# Altium PCB project1.PcbDoc
Units mil, origin at the board's own origin, x right, y up, seen from the top; angles counter-clockwise.
Board outline 2860 x 960 mil, 2 copper layers (Top Layer, Bottom Layer); 35 components, 44 nets, 113 pads, 10 vias.
Unrouted connection lines stored in the file: 1.
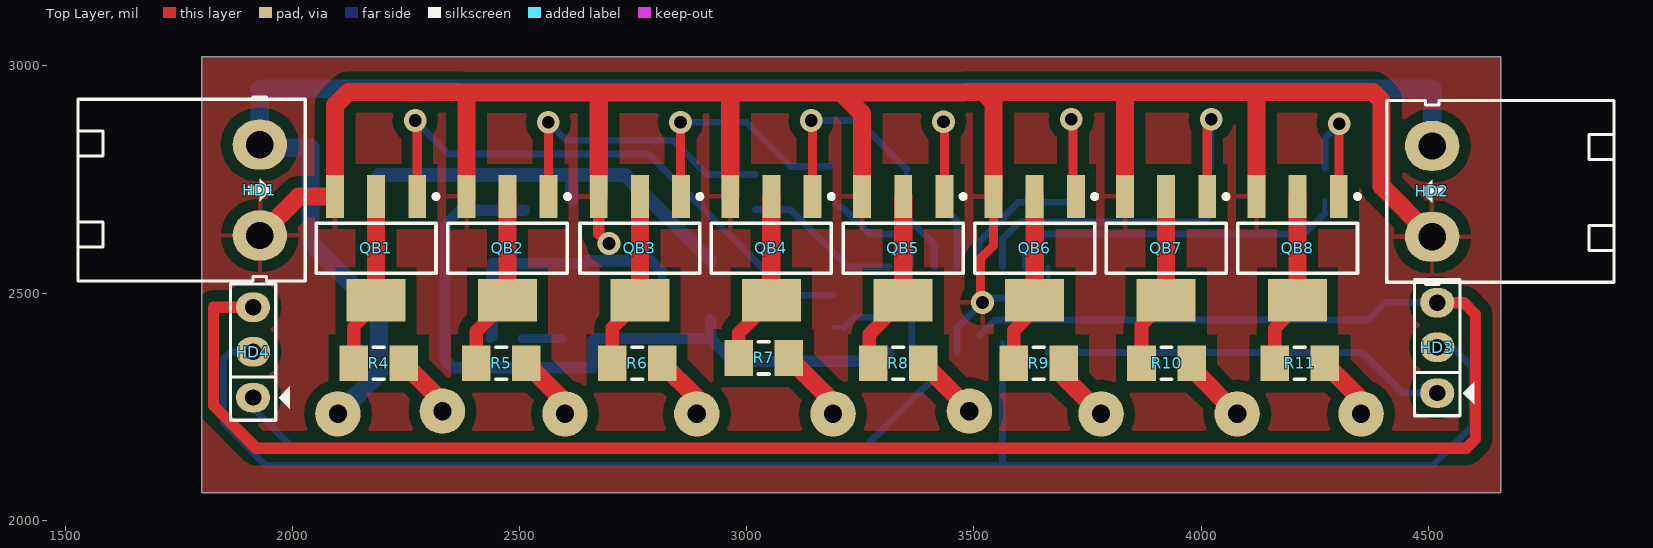
[diagram p0: Top Layer view]
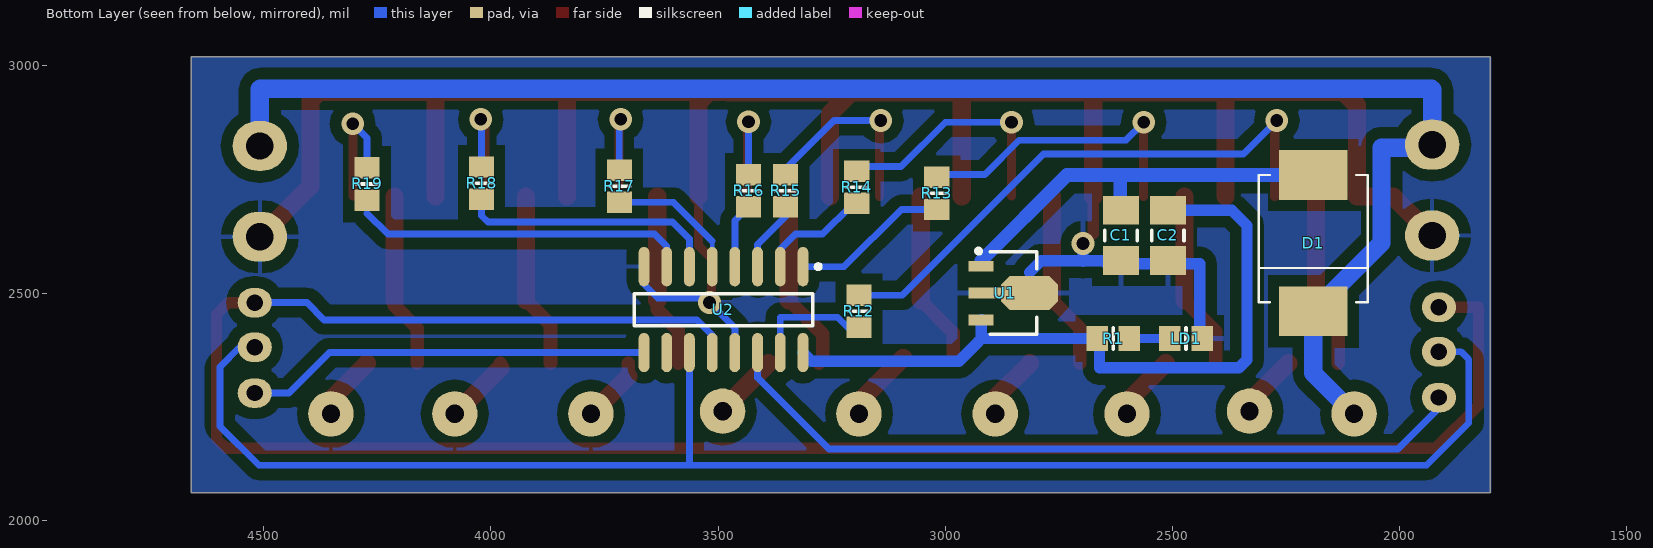
[diagram p1: Bottom Layer view, seen from below]
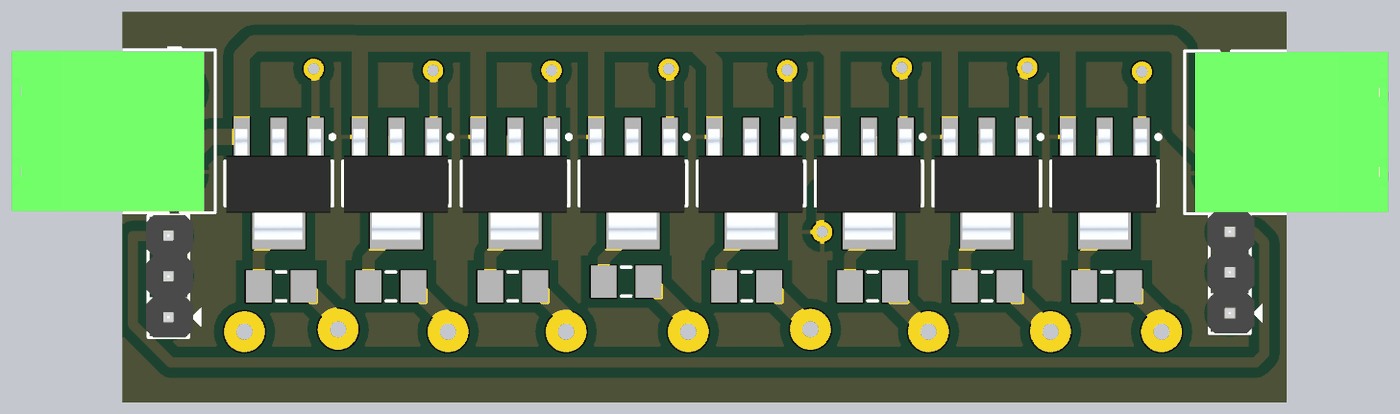
[diagram p2: 3D render of the assembled board from above, using the file's embedded part models]

## Layer stack, top to bottom
Top Layer: signal copper 1.4
Dielectric: dielectric 12.6, FR-4, Dk 4.8
Bottom Layer: signal copper 1.4

## Board outline
1800,3020 1800,2060 4660,2060 4660,3020

## Design rules (kind name [scope] priority, off if disabled: settings)
Clearance Polygon [All vs InPolygon] p1: gap=25
Clearance [All] p2: gap=10
PolygonConnect [All] p1: connectstyle=Relief reliefconductorwidth=10 reliefentries=4 polygonreliefangle="90 Angle"
RoutingVias [All] p1: holewidth=28 width=50 viastyle="Through Hole" minholewidth=28 minwidth=50 maxholewidth=28 maxwidth=50
SilkscreenOverComponentPads SilkToSolderMaskClearance [IsPad] p1: minsilkscreentomaskgap=10
SolderMaskExpansion [All] p1: expansion=4
Width [All] p1: maxlimit=1000 minlimit=5 preferedwidth=15
27 further rules are at their usual default settings.

## Classes and differential pairs
component class project1: C1 C2 D1 HD1 HD2 HD3 HD4 LD1 QB1 QB2 QB3 QB5 QB6 QB7 QB8 R1 R4 R5 R6 R7 R8 R9 R10 R11 R12 R14 R15 R16 R17 R18 R19 U1 U2

## Components (designator, comment, footprint, x,y, rotation, side; value= is the part's Value field where it differs from the comment)
C1 "100uF/35V" MELF-R3216-1206 2613.19,2626.97 r270 bottom
C2 "1000uF/16V" MELF-R3216-1206 2509.84,2626.97 r270 bottom
D1 "1N4007" DIODE_SMC 2190,2610 r90 bottom
HD1 "Header 2" HED2T 1928.15,2826.77 r270 top
HD2 "Header 2" HED2T 4508.86,2624.02 r90 top
HD3 "Header 3" JP3 4520,2380 r90 top
HD4 "Header 3" JP3 1913.39,2370.08 r90 top
LD1 "LED" 6-0805_N 2470,2400 r180 bottom
QB1 "D718" SOT223-4N 2184.06,2598.43 r270 top
QB2 "D718" SOT223-4N 2473.43,2598.43 r270 top
QB3 "D718" SOT223-4N 2764.76,2598.43 r270 top
QB4 "D718" SOT223-4N 3054.13,2598.43 r270 top
QB5 "D718" SOT223-4N 3344.49,2598.43 r270 top
QB6 "D718" SOT223-4N 3633.86,2598.43 r270 top
QB7 "D718" SOT223-4N 3923.23,2598.43 r270 top
QB8 "D718" SOT223-4N 4212.6,2598.43 r270 top
R1 "1K" 6-0805_N 2630,2400 r0 bottom
R4 "1K" MELF-R3216-1206 2189.96,2345.47 r0 top
R5 "1K" MELF-R3216-1206 2459.65,2345.47 r0 top
R6 "1K" MELF-R3216-1206 2758.86,2345.47 r0 top
R7 "1K" MELF-R3216-1206 3037.4,2357.28 r0 top
R8 "1K" MELF-R3216-1206 3333.66,2345.47 r0 top
R9 "1K" MELF-R3216-1206 3642.72,2345.47 r0 top
R10 "1K" MELF-R3216-1206 3924.21,2345.47 r0 top
R11 "1K" MELF-R3216-1206 4217.52,2345.47 r0 top
R12 "1K" 6-0805_N 3190,2460 r90 bottom
R13 "1K" 6-0805_N 3018.7,2719.49 r90 bottom
R14 "1K" 6-0805_N 3194.88,2733.27 r90 bottom
R15 "1K" 6-0805_N 3351.38,2725.39 r90 bottom
R16 "1K" 6-0805_N 3433.07,2725.39 r90 bottom
R17 "1K" 6-0805_N 3717.52,2735.24 r90 bottom
R18 "1K" 6-0805_N 4020.67,2742.13 r90 bottom
R19 "1K" 6-0805_N 4272.64,2740.16 r90 bottom
U1 "L78M05ABV" SOT89N 2850,2500 r180 bottom
U2 "74HC595" so16 3488.19,2463.58 r270 bottom

## Footprints (in the part's own frame and the unit in brackets; to place one, negate y for a bottom-side part, rotate by r counter-clockwise, add the part's x,y. Pads: shape width x height; smd on the part's side, far side on the other; paste and mask are expansions set on the pad)
6-0805_N [mm] "Chip Resistor, Body 2.0x1.2mm, IPC Medium Density"
  rect 1.2x1.4 smd: 1(-0.9,0) 2(0.9,0)
  silkscreen extent 0,-0.6 0,0.6, body extent -1.07,-0.7 1.07,0.7, height 0.7
DIODE_SMC [mil] "Diode; 2 Leads"
  rect 110x150 smd: 1(-150,0) 2(150,0)
  silkscreen extent -130,-120 150,120
HED2T [mil] "Header 2, 2 pin, hight 300mil, Pin to Pin 200, Colour Green"
  oval 110x120 hole 60: 1(0,0) 2(200,0)
  silkscreen extent -105,-400 300,100, body extent -97,-399 297,73, height 334
JP3 [mil] "Jumper 3"
  oval 65x75 hole 36: 1(-100,0) 2(1,0) 3(99,0)
  silkscreen extent -150,-81 150,50, body extent -150,-60 150,55, height 355
MELF-R3216-1206 [mm] "Metal Electrode Face (MELF) Resistor; Body 3.2 x 1.8 mm (LxDia)"
  rect 1.6x2 smd: 1(-1.4,0) 2(1.4,0)
  silkscreen extent -0.3,-0.9 0.3,0.9
so16 [mm] "SOIC, 16-Leads, Body 9.9x3.9mm, Pitch 1.27mm, IPC Medium Density"
  oval 2.2x0.6 smd: 1(-2.4,4.445) 2(-2.4,3.175) 3(-2.4,1.905) 4(-2.4,0.635) 5(-2.4,-0.635) 6(-2.4,-1.905) 7(-2.4,-3.175) 8(-2.4,-4.445) 9(2.4,-4.445) 10(2.4,-3.175) 11(2.4,-1.905) 12(2.4,-0.635) 13(2.4,0.635) 14(2.4,1.905) 15(2.4,3.175) 16(2.4,4.445)
  silkscreen extent -2.52,-5 0.9,5.42, body extent -1.95,-4.95 1.95,4.95, height 1.75
SOT89N [mm] "SOT89, 3-Leads, Body 4.5x2.4 mm, Pitch 1.5mm, Lead Span 4.1mm, IPC Medium Density"
  rect 1.4x0.6 smd: 1(-1.8,1.5) 3(-1.8,-1.5)
  rect 1.8x0.6 smd: 2(-1.6,0)
  oct 3.2x1.9 smd: 2(0.9,0)
  silkscreen extent -2.07,-2.3 1.3,2.47, body extent -1.3,-2.3 1.3,2.3, height 1.6
SOT223-4N [mm] "SOT223, 4-Leads, Body 6.5x3.5mm, Pitch 2.3mm, Lead Span 7mm, IPC Medium Density"
  rect 2.4x1 smd: 1(-2.9,2.3) 2(-2.9,0) 3(-2.9,-2.3)
  rect 2.4x3.3 smd: 4(2.9,0)
  silkscreen extent -3.02,-3.35 1.4,3.48, body extent -3.39,-3.27 3.5,3.23, height 1.72

## Part data
C1: library part CP3, "Cap 100uF/35V - 470uF/16V"
C2: library part CP4, "Cap 1000uF/16V - 220uF/50V"
D1: library part D1A, "Diode 1A"
HD1 HD2: library part "Hed 2", "Header 2 (Green)"
HD3 HD4: library part "Hed 3", "Header 3 (Green)"
LD1: "LED Single colour Green and Red"
QB1 QB2 QB3 QB4 QB5 QB6 QB7 QB8: "Transistor Power Supply"
R1 R4 R5 R6 R7 R8 R9 R10 R11 R12 R13 R14 R15 R16 R17 R18 R19: library part R1/4W, "Resistor 1/4W"
U1: "Precision 500mA Regulator"

## Free pads (board coordinates)
  round 100 hole 40: 5(3490,2240) 6(3780,2234.25) 7(4079.72,2234.25) 8(4352.36,2234.25) 9(3190,2234.25) 10(2890,2234.25) 11(2600,2234.25) 12(2330,2240) 13(2100,2234.25)

## Via types
v1: diameter 50, hole 28, Top Layer to Bottom Layer, 10 vias

## Nets (pads, with @x,y where several pads share a name; then routed paths per layer and width w, separated by ;. In a path a pad name is that pad's centre, name@x,y a point inside that pad or via, vN(x,y) a via of type N, cw(c..) or ccw(c..) an arc to the next point about the centre after c; other vN are vias at no path point)
5VDC: U2.10
12VDC: D1.1 HD1.1 HD2.2 pad.13 | length 3638.5
  Top Layer w30: pad.13@2100,2220 pad.13
  Bottom Layer w30: HD1.1 HD1.1@1934.92,2820
  Bottom Layer w40: HD1.1 1928.15,2948.15 ; 1930,2950 4507.95,2950 ; HD1.1@1934.92,2820 2040,2820 2040,2610 D1.1 2190,2324.25 pad.13 ; HD2.2 4508.86,2949.09
CLOCK: HD3.2 HD4.2 U2.11 | length 3531.5
  Bottom Layer w10: U2.11 U2.11@3563.19,2391.93
  Bottom Layer w15: HD4.2 1865.17,2371.08 1847.44,2353.35 1847.44,2214.57 1940.94,2121.06 4510.83,2121.06 4596.46,2206.69 4596.46,2337.6 4553.06,2381 HD3.2 ; 3563.19,2121.06 U2.11
"DATA IN": HD4.1 U2.14 | length 1681.1
  Bottom Layer w10: HD4.1@1913.39,2246.61 HD4.1
  Bottom Layer w15: HD4.1@1913.39,2246.61 2003.5,2156.5 3255.91,2156.5 3413.19,2313.78 U2.14
"DATA OUT": HD3.1 U2.9 | length 893.7
  Bottom Layer w15: U2.9 4355.31,2369.09 4444.41,2280 HD3.1
GND: C1.2 C2.2 HD1.2 HD2.1 LD1.2 QB1.3 QB2.3 QB3.3 QB4.3 QB5.3 QB6.3 QB7.3 QB8.3 U1.2 U2.8 U2.13 | length 6358.6
  Top Layer w10: v1@3514.76,2481.3 3517.03,2481.3 v1(3518.87,2479.45)
  Top Layer w20: 2674.21,2630.91 2687.01,2618.11 2705.71,2618.11 v1(2696.85,2609.25) ; v1@3514.76,2481.3 3514.76,2576.77 3543.31,2605.32 QB6.3
  Top Layer w25: 2674.21,2630.91 QB3.3
  Top Layer w30: 2369.09,2942.91 2375,2937.01 ; 2379.72,2941.73 2375,2937.01 ; 2674.21,2938.58 2382.87,2938.58 2382.87,2929.13 2375,2937.01 ; 3478.35,2941.73 3479.53,2942.91 ; 4116.14,2942.91 4122.05,2937.01
  Top Layer w40: HD1.2 2013.98,2712.6 QB1.3 2093.5,2913.39 2123.03,2942.91 2369.09,2942.91 ; 2379.72,2941.73 3207.87,2941.73 ; QB2.3 2382.87,2929.13 ; QB3.3 2674.21,2938.58 ; QB4.3 2963.58,2932.09 ; QB5.3 3253.94,2895.67 3207.87,2941.73 ; 3478.35,2941.73 3207.87,2941.73 ; 3479.53,2942.91 3832.68,2942.91 ; 3520.87,2941.73 3543.31,2919.29 QB6.3 ; QB7.3 3832.68,2942.91 ; QB8.3 4122.05,2937.01 ; HD2.1 4397.64,2735.24 4397.64,2924.21 4378.94,2942.91 4116.14,2942.91 3832.68,2942.91
  Bottom Layer w10: v1(3518.87,2479.45) v1@3528.59,2489.17 ; U2.8@3663.19,2519.49 U2.8
  Bottom Layer w15: U2.13 3463.19,2423.19 v1@3519.16,2479.16 ; v1@3528.59,2489.17 3632.87,2489.17 U2.8@3663.19,2519.49
  Bottom Layer w20: LD1.2 LD1.2@2440,2405.43 ; v1@2691.93,2610.24 v1@2698.82,2610.24 ; 2720.68,2570.87 2721.46,2571.64 ; U1.2@2814.57,2500 2814.57,2545.43
  Bottom Layer w25: LD1.2@2440,2405.43 2440,2564.88 C1.2@2644.68,2564.88 ; C1.2@2644.68,2567.91 2647.64,2570.87 2720.68,2570.87 2789.13,2570.87 2814.57,2545.43 ; 2696.85,2569.88 v1(2696.85,2609.25)
LED1: pad.12 R4.2 | length 140.6
  Top Layer w30: pad.12 pad.12@2330,2260.55
  Top Layer w40: R4.2 pad.12@2330,2260.55
LED2: pad.11 R5.2 | length 146.5
  Top Layer w30: pad.11 pad.11@2600,2260.24
  Top Layer w40: R5.2 pad.11@2600,2260.24
LED3: pad.10 R6.2 | length 142.7
  Top Layer w30: pad.10 pad.10@2890,2269.45
  Top Layer w40: R6.2 pad.10@2890,2269.45
LED4: pad.9 R7.2 | length 163.4
  Top Layer w30: pad.9 pad.9@3190,2259.8
  Top Layer w40: R7.2 pad.9@3190,2259.8
LED5: pad.5 R8.2 | length 147.4
  Top Layer w30: pad.5 pad.5@3490,2244.25
  Top Layer w40: R8.2 pad.5@3490,2244.25
LED6: pad.6 R9.2 | length 145.3
  Top Layer w30: R9.2@3697.83,2316.42 R9.2
  Top Layer w40: R9.2@3697.83,2316.42 pad.6
LED7: pad.7 R10.2 | length 152.8
  Top Layer w30: R10.2@3979.33,2334.65 R10.2
  Top Layer w40: R10.2@3979.33,2334.65 pad.7
LED8: pad.8 R11.2 | length 144.2
  Top Layer w30: pad.8 pad.8@4352.36,2265.75
  Top Layer w40: R11.2 pad.8@4352.36,2265.75
NetC1_1: C1.1 D1.2 U1.1 | length 867.5
  Bottom Layer w10: U1.1 2920.87,2571.26
  Bottom Layer w30: D1.2 2732.13,2760 2920.87,2571.26 ; C1.1@2615.16,2707.68 2615.16,2753.94
NetLD1_1: LD1.1 R1.1 | length 89.1
  Bottom Layer w20: LD1.1 R1.1
NetQB1_1: QB1.1 R12.2 | length 1248.6
  Top Layer w10: v1(2270,2880) v1@2274.61,2875.39
  Top Layer w20: QB1.1 v1@2274.61,2875.39
  Bottom Layer w15: v1(2270,2880) 2343.9,2806.1 2783.9,2806.1 3094.57,2495.43 R12.2
NetQB1_2: QB1.2 QB1.4 R4.1 | length 387.5
  Top Layer w25: 2134.84,2424.84 2184.06,2474.06 QB1.4
  Top Layer w30: R4.1 2134.84,2424.84
  Top Layer w40: QB1.4 QB1.2
NetQB2_1: QB2.1 R13.2 | length 667.2
  Top Layer w10: v1(2562.99,2875.98) v1@2563.98,2875
  Top Layer w20: QB2.1 v1@2563.98,2875
  Bottom Layer w15: v1(2562.99,2875.98) 2602.36,2836.61 2837.13,2836.61 2912.92,2760.83 R13.2@3018.7,2760.83
NetQB2_2: QB2.2 QB2.4 R5.1 | length 395.7
  Top Layer w30: R5.1 2404.53,2415.35 QB2.4
  Top Layer w40: QB2.4 QB2.2
NetQB3_1: QB3.1 R14.2 | length 533.9
  Top Layer w10: QB3.1@2854.33,2713.58 QB3.1
  Top Layer w20: QB3.1@2854.33,2713.58 v1(2854.33,2875.98)
  Bottom Layer w15: v1(2854.33,2875.98) 3000,2875.98 3097.44,2778.54 R14.2@3184.06,2778.54
NetQB3_2: QB3.2 QB3.4 R6.1 | length 392.4
  Top Layer w30: R6.1 2703.74,2423.23 QB3.4
  Top Layer w40: QB3.4 QB3.2
NetQB4_1: QB4.1 R15.2 | length 435
  Top Layer w10: v1(3141.73,2879.92) v1@3144.69,2876.97
  Top Layer w20: QB4.1 v1@3144.69,2876.97
  Bottom Layer w10: R15.2 R15.2@3351.38,2773.62
  Bottom Layer w15: v1(3141.73,2879.92) 3245.08,2879.92 R15.2@3351.38,2773.62
NetQB4_2: QB4.2 QB4.4 R7.1 | length 385.1
  Top Layer w30: R7.1 2982.28,2412.4 QB4.4
  Top Layer w40: QB4.4 QB4.2
NetQB5_1: QB5.1 R16.2 | length 322.1
  Top Layer w20: QB5.1 v1@3435.04,2874.96
  Bottom Layer w10: v1(3433.07,2876.93) 3430,2880 3433.07,2883.07 3433.07,2891.73 3441.93,2882.87 v1@3441.93,2869.09
  Bottom Layer w15: R16.2 v1(3433.07,2876.93)
NetQB5_2: QB5.2 QB5.4 R8.1 | length 401.5
  Top Layer w30: R8.1 3270,2354.02 3270,2409.76 QB5.4
  Top Layer w40: QB5.4 QB5.2
NetQB6_1: QB6.1 R17.2 | length 289.9
  Top Layer w10: v1@3718.5,2874.02 v1@3726.38,2881.89
  Top Layer w20: v1@3718.5,2874.02 3718.5,2718.5 QB6.1
  Bottom Layer w10: v1@3717.52,2873.03 v1@3726.38,2881.89
  Bottom Layer w15: R17.2 v1@3717.52,2873.03
  other v1: 3714.57,2882.87
NetQB6_2: QB6.2 QB6.4 R9.1 | length 386.3
  Top Layer w30: R9.1 3587.6,2417.6 3633.86,2463.86 QB6.4
  Top Layer w40: QB6.4 QB6.2
NetQB7_1: QB7.1 R18.2 | length 270.6
  Top Layer w20: QB7.1 v1@4013.78,2878.94
  Bottom Layer w10: v1@4013.78,2878.94 v1@4020.67,2872.05
  Bottom Layer w15: R18.2 v1@4020.67,2872.05
  other v1: 4022.64,2882.87
NetQB7_2: QB7.2 QB7.4 R10.1 | length 389.5
  Top Layer w30: R10.1 3869.09,2430.12 QB7.4
  Top Layer w40: QB7.4 QB7.2
NetQB8_1: QB8.1 R19.2 | length 271.3
  Top Layer w10: QB8.1 QB8.1@4304.13,2713.58
  Top Layer w20: QB8.1@4304.13,2713.58 v1(4304.13,2873.03)
  Bottom Layer w15: R19.2 4272.64,2841.54 v1(4304.13,2873.03)
NetQB8_2: QB8.2 QB8.4 R11.1 | length 387.9
  Top Layer w30: R11.1 4162.4,2422.4 4212.6,2472.6 QB8.4
  Top Layer w40: QB8.4 QB8.2
NewNet: 
O0: R12.1 U2.15 | length 260.1
  Bottom Layer w10: R12.1 R12.1@3214.57,2424.57
  Bottom Layer w15: R12.1@3214.57,2424.57 3236.81,2446.81 3363.19,2446.81 U2.15
O1: R13.1 U2.1 | length 346.7
  Bottom Layer w15: R13.1 3096.46,2684.06 3222.44,2558.07 U2.1
O2: R14.1 U2.2 | length 248.9
  Bottom Layer w10: R14.1 R14.1@3202.76,2689.96 ; 3266.73,2633.27 3270,2630 ; U2.2 U2.2@3363.19,2596.81
  Bottom Layer w15: R14.1@3202.76,2689.96 3210.04,2689.96 3266.73,2633.27 ; 3270,2630 3330,2630 U2.2@3363.19,2596.81
O3: R15.1 U2.3 | length 157.5
  Bottom Layer w10: R15.1@3351.38,2668.62 R15.1
  Bottom Layer w15: R15.1@3351.38,2668.62 3413.19,2606.81 U2.3
O4: R16.1 U2.4 | length 144.4
  Bottom Layer w15: R16.1 3463.19,2659.84 U2.4
O5: R17.1 U2.5 | length 296.1
  Bottom Layer w10: U2.5 3513.19,2614.57
  Bottom Layer w15: 3513.19,2614.57 3598.43,2699.8 R17.1
O6: R18.1 U2.6 | length 576.2
  Bottom Layer w15: U2.6 3563.19,2619.29 3600.39,2656.5 4006.89,2656.5 4020.67,2670.28 R18.1
O7: R19.1 U2.7 | length 763.9
  Bottom Layer w10: 4272.64,2675.2 R19.1
  Bottom Layer w15: U2.7 3613.19,2603.19 3639.76,2629.76 4227.2,2629.76 4272.64,2675.2
SHIFT: HD3.3 HD4.3 U2.12 | length 4534.7
  Top Layer w25: HD4.3 1826.2,2469.08 1826.2,2252.54 1920.28,2158.46 4583.66,2158.46 4604.33,2179.13 4604.33,2453.08 4578.41,2479 HD3.3
  Bottom Layer w15: U2.12@3513.19,2407.87 3546.26,2440.94 4367.13,2440.94 4405.18,2479 HD3.3
ttt: 
VCC: C2.1 R1.2 U1.3 U2.16 | length 1585.6
  Bottom Layer w25: C2.1 2369.09,2682.09 2335.63,2648.62 2335.63,2353.35 2353.35,2335.63 2660.43,2335.63 R1.2@2660.43,2395 ; R1.2 2919.88,2400 2920.87,2399.02 U1.3 ; 2926.18,2393.7 2969.88,2350 3294.09,2350 U2.16

## Polygon pours and split planes (outlines as drawn)
GND on Top Layer "Bottom Overlay-No Net" (solid, pour order 2): 1799.21,3020.67 1799.21,2060.04 1800.2,2059.06 1801.18,2060.04 4660.43,2060.04 4660.43,3020.67
GND on Bottom Layer "Bottom Overlay-No Net" (solid, pour order 4): 1800.2,3020.67 1798.23,3018.7 1798.23,2061.02 4660.43,2061.02 4660.43,3021.65